# EAGLE board PL-N823-01 Breakout (EAGLE 9.4.0)
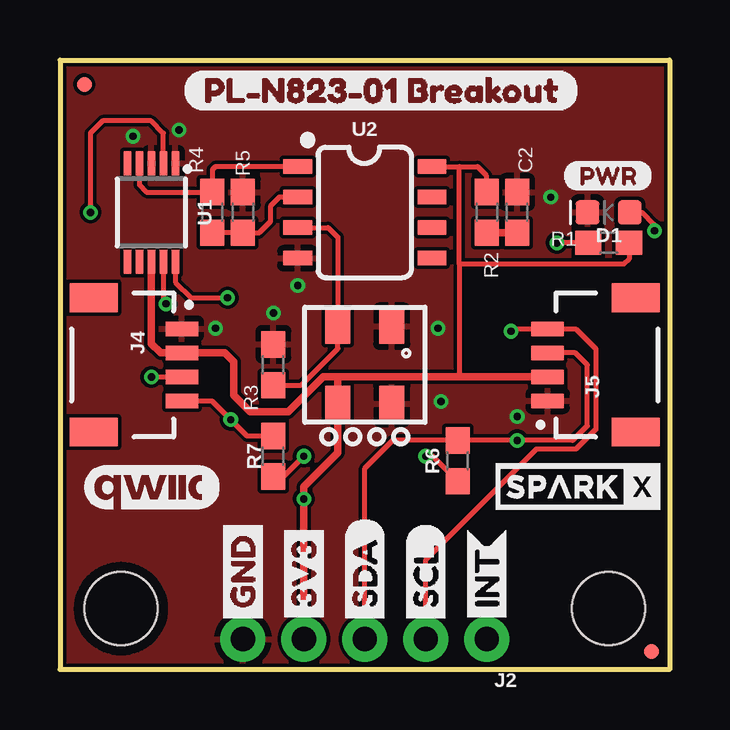
[diagram p0: board, top side]
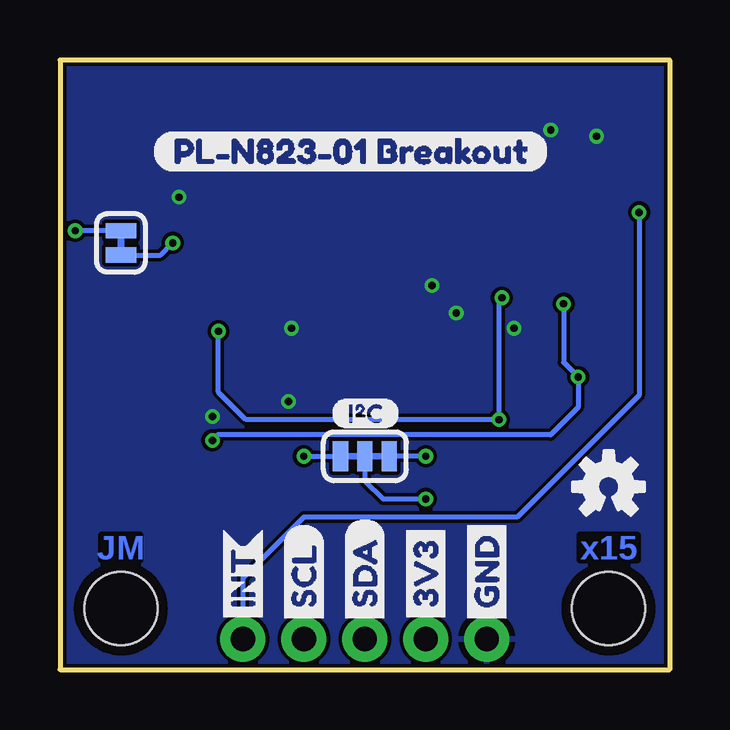
[diagram p1: board, bottom side, seen from below]

Size 25.4 x 25.4 mm. Coordinates in mm from the lower left corner, seen from the top.
Outline: 0,25.4 25.4,25.4 25.4,0 0,0 0,25.4
Copper layers (1*16): Top 0.035mm / dielectric 1.5mm / Bottom 0.035mm
Design rules "SparkFun-2-layer-PCBWay-LIMIT": minimum track width 6mil, minimum drill 0.3mm, track to track 6mil, track to pad 6mil, pad to pad 6mil, via to via 6mil, smd to smd 6mil, copper to edge 6mil, drill to drill 6mil, minimum pad ring 6mil, minimum via ring 6mil, stop-mask expansion 4mil, vias tented up to drill 25mil, thermal gap 10mil
Net classes: 1 power: width 0.305 mm

## Footprints (pad centres in the part's own frame; a part is rotated, then mirrored left to right if it is on the bottom)
0603 = smd 1.1 x 1: 1 -0.85,0; 2 0.85,0
LED-0603 = smd 1 x 1: A -0.877,0; C 0.877,0
FIDUCIAL-MICRO = smd 0.635 x 0.635: 1 0,0
STAND-OFF-TIGHT = hole 3.048: 0,0
1X05_NO_SILK = drill 1.016 pad 1.88: 1 0,0; 2 2.54,0; 3 5.08,0; 4 7.62,0; 5 10.16,0
JST04_1MM_RA = smd 0.6 x 1.35: 1 -1.5,0; 2 -0.5,0; 3 0.5,0; 4 1.5,0 | smd 1.2 x 2: NC1 2.8,-3.675; NC2 -2.8,-3.675
SMT-JUMPER_3_2-NC_TRACE_SILK = smd 0.635 x 1.27: 1 -1.016,0; 2 0,0; 3 1.016,0
SMT-JUMPER_2_NC_TRACE_SILK = smd 0.635 x 1.27: 1 -0.508,0; 2 0.508,0
MSOP10 = smd 0.3 x 1: 1 -1,-2.05; 2 -0.5,-2.05; 3 0,-2.05; 4 0.5,-2.05; 5 1,-2.05; 6 1,2.05; 7 0.5,2.05; 8 0,2.05; 9 -0.5,2.05; 10 -1,2.05
SO08 = smd 0.6 x 1.2: 1 -1.905,-2.8; 2 -0.635,-2.8; 3 0.635,-2.8; 4 1.905,-2.8; 5 1.905,2.8; 6 0.635,2.8; 7 -0.635,2.8; 8 -1.905,2.8
PL-N823-01 = smd 1.05 x 1.475: DRAIN -1.125,-1.613; GND@1 1.125,1.613; GND@2 1.125,-1.613; SOURCE -1.125,1.613

## Placement (x,y rotation side)
C2  0.1uF  [0603]  19.05,19.05 90 top
D1  BLUE  [LED-0603]  22.86,19.05 180 top
FD1  FIDUCIALUFIDUCIAL  [FIDUCIAL-MICRO]  1.02,24.38 0 top
FD2  FIDUCIALUFIDUCIAL  [FIDUCIAL-MICRO]  24.64,0.76 0 top
FRAME1  FRAME-LETTERNO_PACKAGE  [DUMMY]  0,0 0 top
H1  STAND-OFFTIGHT  [STAND-OFF-TIGHT]  2.54,2.54 0 top
H2  STAND-OFFTIGHT  [STAND-OFF-TIGHT]  22.86,2.54 0 top
J2  [1X05_NO_SILK]  17.78,1.27 180 top
J4  [JST04_1MM_RA]  5.08,12.7 270 top
J5  [JST04_1MM_RA]  20.32,12.7 90 top
JP1  JUMPER-SMT_3_2-NC_TRACE_SILK  [SMT-JUMPER_3_2-NC_TRACE_SILK]  12.7,8.89 0 bottom
JP2  JUMPER-SMT_2_NC_TRACE_SILK  [SMT-JUMPER_2_NC_TRACE_SILK]  22.86,17.78 90 bottom
R1  27  [0603]  22.86,17.78 0 top
R2  10k  [0603]  17.78,19.05 270 top
R3  47k  [0603]  8.89,12.7 90 top
R4  2.49k  [0603]  6.35,19.05 90 top
R5  1k  [0603]  7.62,19.05 270 top
R6  2.2k  [0603]  16.57,8.7 90 top
R7  2.2k  [0603]  8.89,8.89 90 top
U1  ADS1015  [MSOP10]  3.81,19.05 180 top
U2  LMV358  [SO08]  12.7,19.05 270 top
U3  PL-N823-01  [PL-N823-01]  12.7,12.7 0 top
U$1  [QWIIC_COPYRIGHT_SMALL]  3.81,7.62 0 top
U$2  [SDA-[)]  12.7,1.65 90 top
U$3  [INT0]  17.78,1.65 90 bottom
U$4  [PL#N823#01_BREAKOUT0]  21.59,21.59 0 bottom
U$5  [I_SUPER2_C-()-03]  14.1,10.67 0 bottom
U$7  [OSHW-LOGO-S]  2.54,7.62 0 bottom
U$8  [PL#N823#01_BREAKOUT0]  5.08,24.13 0 top
U$9  [PWR-()-03]  20.95,20.57 0 top
U$10  [SPARKX-SMALL]  21.59,7.62 0 top
U$12  [SCL-[)]  15.24,1.65 90 top
U$13  [SDA-[)]  12.7,1.65 90 bottom
U$14  [SCL-[)]  15.24,1.65 90 bottom
U$15  [3V3-04]  10.16,1.65 90 top
U$16  [3V3-04]  10.16,1.65 90 bottom
U$17  [GND-04]  7.62,1.65 90 top
U$18  [GND-04]  7.62,1.65 90 bottom
U$21  [INT0]  17.78,1.65 90 top

## Library data of the parts
C2 = SparkFun-Capacitors; PROD_ID: CAP-00810
D1 = SparkFun-LED; PROD_ID: DIO-08575
FD1 FD2 U$7 = SparkFun-Aesthetics
FRAME1 = SparkFun-Aesthetics; DESIGNER: Nobody; VERSION: v01
H1 H2 = SparkFun-Hardware
J2 = SparkFun-Connectors
J4 J5 = SparkFun-Connectors; PROD_ID: CONN-13694
JP1 JP2 = SparkFun-Jumpers
R1 = SparkFun-Resistors; PROD_ID: RES-09334
R2 = SparkFun-Resistors; PROD_ID: RES-00824
R3 = SparkFun-Resistors; PROD_ID: RES-07871
R4 = SparkFun-Resistors; PROD_ID: RES-09568
R5 = SparkFun-Resistors; PROD_ID: RES-07856
R6 R7 = SparkFun-Resistors; PROD_ID: RES-08272
U1 = SparkFun-IC-Conversion; PROD_ID: IC-12270
U2 = SparkFun-IC-Amplifiers; PROD_ID: IC-09657
U3 = PL-N823-01
U$1 U$2 U$5 U$9 U$12-U$18 = Labels
U$3 U$21 = buzzard_labels (62)
U$4 U$8 = buzzard_labels_pln82301
U$10 = SparkX

## Nets
3.3V: J2.4 J4.2 J5.2 JP1.2 R1.2 R2.1 U1.8 U2.8 U3.DRAIN
!INT: J2.1 U1.2
GND: C2.2 D1.C J2.5 J4.1 J5.1 R3.2 R5.1 U1.1 U1.3 U2.4 U3.GND@1 U3.GND@2
N$1: R4.1 R5.2 U2.2
N$2: C2.1 R2.2
N$3: JP2.1 R1.1
N$4: JP1.3 R7.1
N$5: JP1.1 R6.1
N$6: D1.A JP2.2
SCL: J2.2 J4.4 J5.4 R7.2 U1.10
SDA: J2.3 J4.3 J5.3 R6.2 U1.9
SIGNAL: R4.2 U1.4 U2.1
SOURCE: R3.1 U2.3 U3.SOURCE

## Tracks (layer width: path | path; a pad name or v marks a point on that pad's centre or on a via)
3.3V  (via drill 0.3)
  Top 0.203: R1.2 23.71,17.11 23.5,16.89 16.64,16.89 | 16.64,16.89 16.64,12.2 | U2.8 16.64,20.95 | 16.64,20.95 17.4,20.95 17.78,20.57 R2.1 | 16.64,16.89 16.64,20.95
  Top 0.305: J5.2 16.64,12.2 11.56,12.2 | 11.56,12.2 10.97,12.2 9.52,10.74 7.93,10.74 7.24,11.43 7.24,12.83 6.87,13.2 J4.2 4.19,13.2 3.81,13.58 U1.8 | 11.56,12.2 11.57,12.18 U3.DRAIN 11.57,9.04 10.16,7.62 v10.16,7.11 J2.4
  Bottom 0.203: JP1.2 12.7,7.87 11.94,7.11 v10.16,7.11
!INT  (via drill 0.3)
  Top 0.203: U1.2 4.31,22.35 3.8,22.86 1.78,22.86 1.27,22.35 v1.27,19.05
  Bottom 0.203: v1.27,19.05 1.27,11.43 6.35,6.35 15.24,6.35 17.78,3.81 J2.1
GND  (via drill 0.3)
  other vias: 15.88,11.18 15.75,14.22 9.91,16 4.95,22.48 3.05,22.23 6.48,14.22 8.89,14.86 19.05,10.54 20.45,19.68
  pour Top: 0,25.4 0,0 25.4,0 25.4,25.4
  pour Bottom: 0,0 0,25.4 25.4,25.4 25.4,0
N$1
  Top 0.203: R4.1 R5.2 8.29,18.2 8.76,18.67 8.76,19.3 9.14,19.68 U2.2
N$2
  Top 0.305: R2.2 C2.1
N$3  (via drill 0.3)
  Top 0.203: R1.1 v20.7,17.78
  Bottom 0.203: JP2.1 21.21,17.27 v20.7,17.78
N$4  (via drill 0.3)
  Top 0.203: R7.1 9.31,8.04 v10.16,8.89
  Bottom 0.203: v10.16,8.89 JP1.3
N$5  (via drill 0.3)
  Top 0.203: R6.1 15.53,8.89 v15.24,8.89
  Bottom 0.203: v15.24,8.89 JP1.1
N$6  (via drill 0.3)
  Top 0.203: D1.A 24.26,19.05 24.77,18.54 v24.77,18.29
  Bottom 0.203: JP2.2 v24.77,18.29
SCL  (via drill 0.3)
  Top 0.203: J4.4 6.33,11.2 v7.11,10.41 7.79,9.74 R7.2 | U1.10 4.81,16.14 5.46,15.49 v6.99,15.49 | v18.8,14.1 18.9,14.2 J5.4 21.49,14.2 22.33,13.36 22.33,10.01 21.51,9.19 19.86,9.19 15.24,4.57 J2.2
  Bottom 0.203: v6.99,15.49 7.11,15.37 v7.11,10.41 17.65,10.41 18.8,11.56 v18.8,14.1
SDA  (via drill 0.3)
  Top 0.203: J5.3 21.47,13.2 21.97,12.7 21.97,10.16 21.36,9.55 v19.05,9.55 R6.2 13.87,9.55 12.7,8.38 J2.3 | v4.42,15.24 4.31,15.35 U1.9 | v3.81,12.19 v3.82,12.2 J4.3
  Bottom 0.203: v4.42,15.24 4.42,12.8 v3.81,12.19 3.81,10.92 4.95,9.78 18.84,9.78 19.05,9.57 v19.05,9.55
SIGNAL
  Top 0.203: U2.1 6.48,20.95 6.35,20.83 R4.2 3.6,19.9 3.31,20.19 U1.4
SOURCE
  Top 0.203: U2.3 11.18,18.41 11.57,18.02 U3.SOURCE 11.57,13.38 10.05,11.85 R3.1

## Text on the board
Bottom: x15 | JM